# Altium PCB XKT3619_wireless_charging_driver_R.PcbDoc
Units mil, origin at the board's own origin, x right, y up, seen from the top; angles counter-clockwise.
Board outline 1181.1 x 591.1 mil, 2 copper layers (Top Layer, Bottom Layer); 16 components, 12 nets, 42 pads, 4 vias.
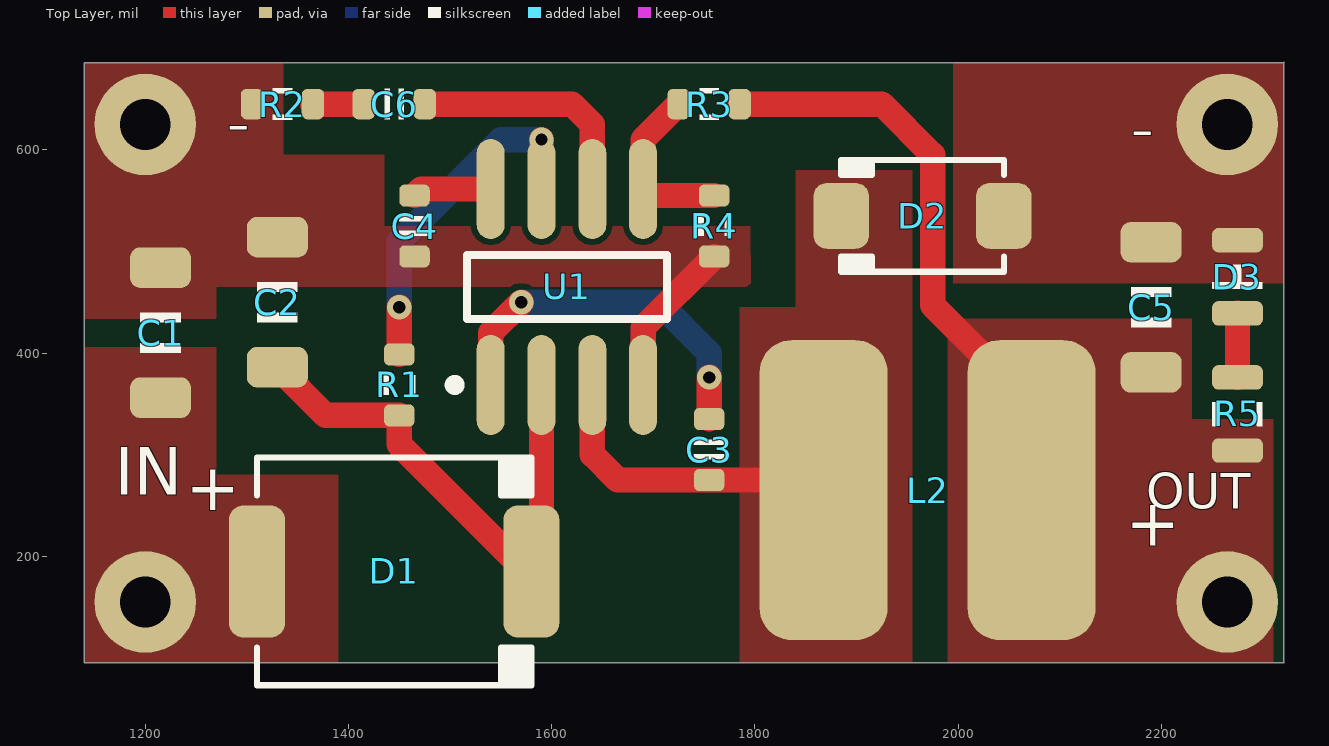
[diagram p0: Top Layer view]
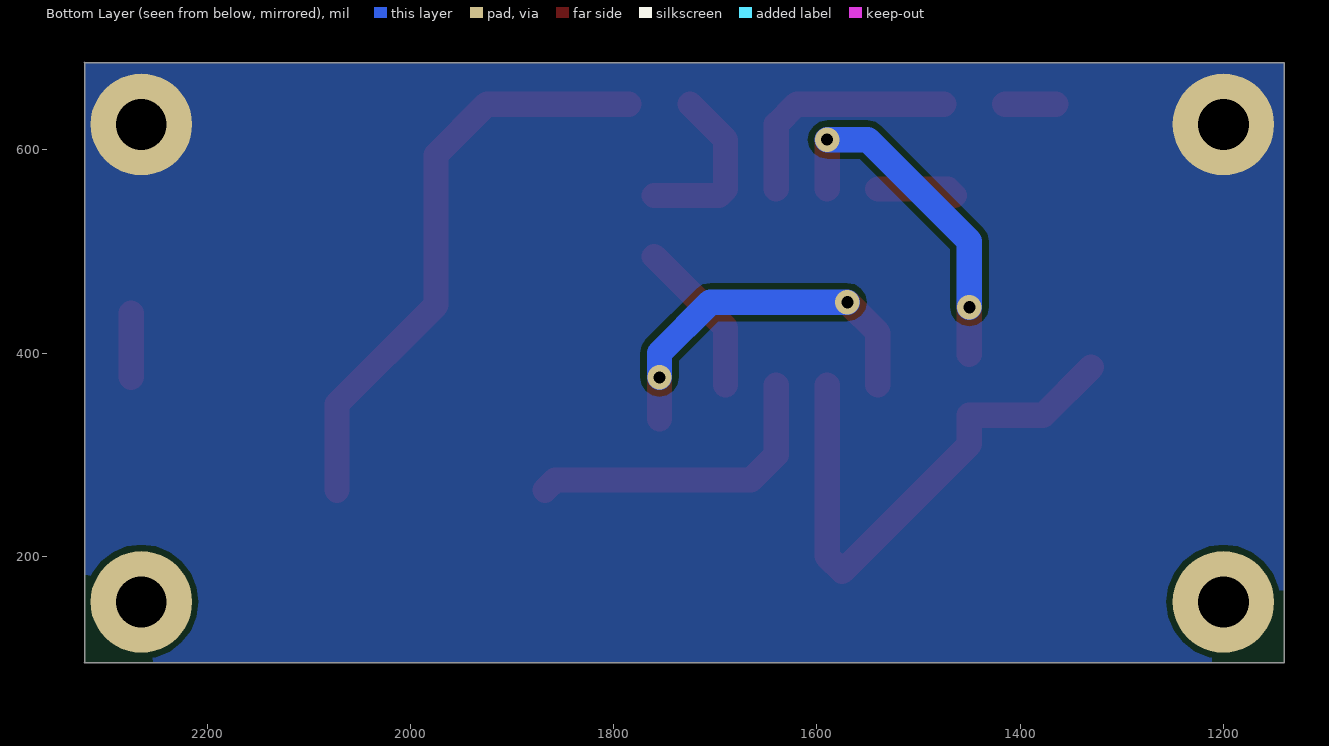
[diagram p1: Bottom Layer view, seen from below]
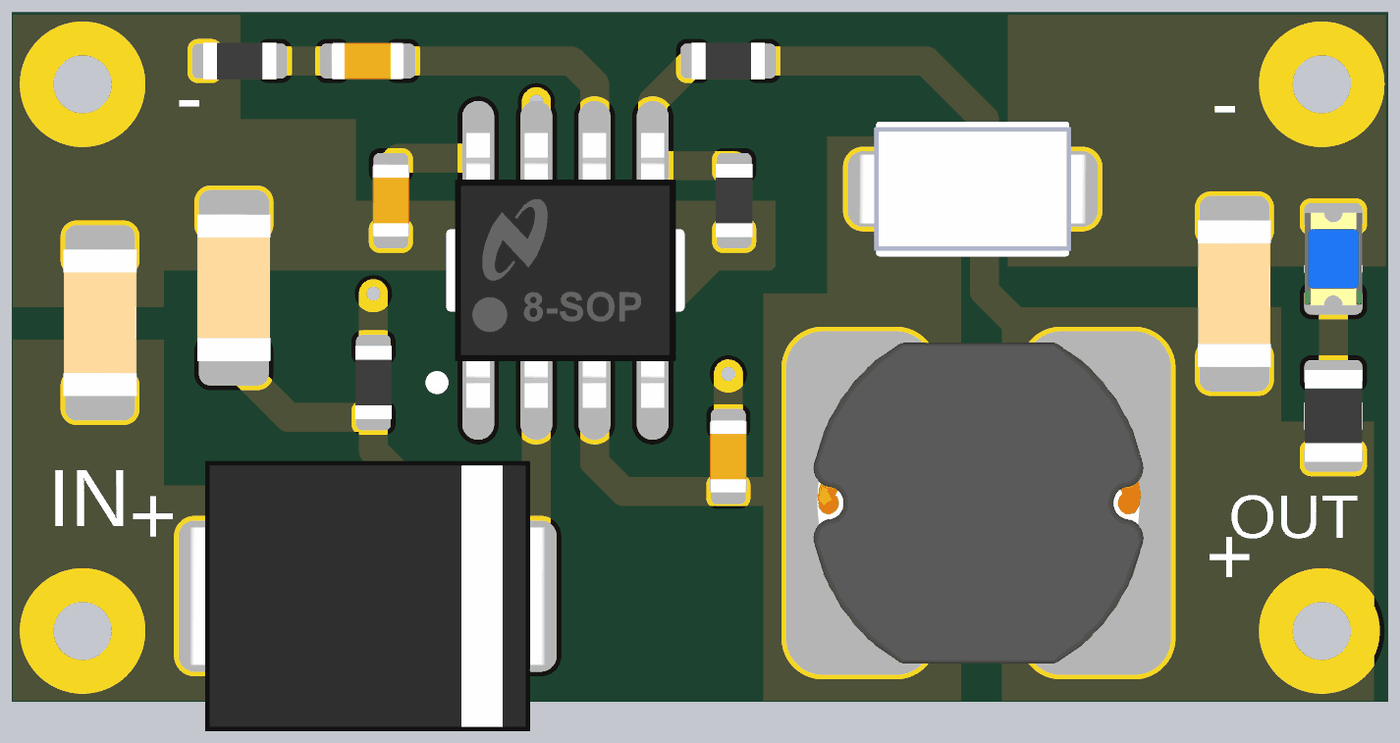
[diagram p2: 3D render of the assembled board from above, using the file's embedded part models]

## Layer stack, top to bottom
Top Solder: solder mask 0.4, Solder Resist, Dk 3.5
Top Layer: signal copper 1.4
Dielectric 1: dielectric 12.6, FR-4, Dk 4.8
Bottom Layer: signal copper 1.4
Bottom Solder: solder mask 0.4, Solder Resist, Dk 3.5

## Board outline
1140,95 2321.1,95 2320.55,95.55 2320.55,686.1 2321.1,685.55 1140,685.55

## Design rules (kind name [scope] priority, off if disabled: settings)
Clearance [All] p1: gap=6 ignorepadtopadclearanceinfootprint=FALSE
PolygonConnect [All] p1: connectstyle=Direct reliefconductorwidth=10 reliefentries=4 polygonreliefangle="90 Angle" airgapwidth=10
RoutingVias [All] p1: holewidth=12 width=24 viastyle="Through Hole" minholewidth=10 minwidth=22 maxholewidth=256 maxwidth=300
ShortCircuit [All] p1: allowed=TRUE
SolderMaskExpansion [All] p1: expansion=4
Width [All] p1: maxlimit=10000 minlimit=6 preferedwidth=10 minimp=50.000000 maximp=50.000000 favimp=50.000000
29 further rules are at their usual default settings.

## Components (designator, comment, footprint, x,y, rotation, side; value= is the part's Value field where it differs from the comment)
C1 "Cap" CAP_1206 1215,420 r270 top value=39NF
C2 "Cap" CAP_1206 1330,450 r270 top value=10uF
C3 "Cap" CAP_0603 1755,305 r90 top value=10nF
C4 "Cap" CAP_0603 1465,525 r270 top value=100nF
C5 "Cap" CAP_1206 2190,445 r270 top value=22F
C6 "Cap" CAP_0603 1445,645 r180 top value=3.3nF
D1 "SS510" DO-214AB 1445,185 r0 top
D2 "SS34" DO-214AC 1965,535 r180 top
D3 "Red" LED_0805 2275,475 r90 top
L2 "Ind" IND_CD75 1970,265 r0 top value=15uH
R1 "Res" RES_0603 1450,368.54 r90 top value=100K
R2 "Res" RES_0603 1335,645 r0 top value=6.8K
R3 "Res" RES_0603 1755,645 r0 top value=44.2K
R4 "Res" RES_0603 1760,525 r90 top value=10K
R5 "Res" RES_0805 2275,340 r270 top value=1K
U1 "XLT-3169" SOP8_M 1615,465 r90 top

## Footprints (in the part's own frame and the unit in brackets; to place one, negate y for a bottom-side part, rotate by r counter-clockwise, add the part's x,y. Pads: shape width x height; smd on the part's side, far side on the other; paste and mask are expansions set on the pad)
CAP_0603 [mil]
  rrect50% 22x30 smd: 1(-30,0) 2(30,0)
  silkscreen extent -10,-15 10,15, body extent -31,-16 31,16, height 31
CAP_1206 [mil]
  rrect50% 40x60 smd: 1(-64,0) 2(64,0)
  silkscreen extent -20,-20 20,20, body extent -65,-31 65,31, height 49
DO-214AB [mil] "SMC"
  rrect50% 55x130 smd: 1(-135,0) 2(135,0)
  silkscreen extent -135,-112 135,112, body extent -154,-116 154,116, height 95
DO-214AC [mil] "SMA"
  rrect50% 55x65 smd: 1(-80,0) 2(80,0)
  silkscreen extent -80,-55 80,55, body extent -98,-53 98,53, height 85
IND_CD75 [mm]
  rrect50% 3.2x7.5 smd: 1(-2.6,0) 2(2.6,0)
  body extent -3.6,-3.5 3.6,3.5, height 5
LED_0805 [mil]
  rrect50% 24x50 smd: 1(-36,0) 2(36,0)
  silkscreen extent -12,-24 12,24, body extent -40,-25 40,25, height 43
RES_0603 [mil]
  rrect50% 22x30 smd: 1(-30,0) 2(30,0)
  silkscreen extent -10,-16 10,16, body extent -31,-16 31,16, height 18
RES_0805 [mil]
  rrect50% 24x50 smd: 1(-36,0) 2(36,0)
  silkscreen extent -12,-25 12,25, body extent -39,-25 39,25, height 24
SOP8_M [mm] "SOIC, 8-Leads, Body 4.9x3.9"
  oval 2.5x0.7 smd: 1(-2.45,1.905) 2(-2.45,0.635) 3(-2.45,-0.635) 4(-2.45,-1.905) 5(2.45,-1.905) 6(2.45,-0.635) 7(2.45,0.635) 8(2.45,1.905)
  silkscreen extent -2.57,-2.5 0.8,2.93, body extent -3,-2.41 3,2.41, height 1.7

## Part data
D1 D2: library part SchottkyDiode, "Schottky Diode"
D3: library part LED, "LED"
L2: "Inductor", Specification="±5% 100mA"
U1: "XKT-3169 是芯科泰无线充电系列通用接收集成电路，体积小输出功率大，可配合各种无线充电方案应用，电路简单使用方便"

## Free pads (board coordinates)
  round 100 hole 50: C(1200,155) C(1200,625) C(2265,155) C(2265,625)

## Via types
v1: diameter 24, hole 12, Top Layer to Bottom Layer, 4 vias

## Nets (pads, with @x,y where several pads share a name; then routed paths per layer and width w, separated by ;. In a path a pad name is that pad's centre, name@x,y a point inside that pad or via, vN(x,y) a via of type N, cw(c..) or ccw(c..) an arc to the next point about the centre after c; other vN are vias at no path point)
GND: C1.1 C2.1 C4.2 C5.1 D2.1 D3.2 pad.C@1200,625 pad.C@2265,625 R2.1 R4.1 U1.4 | length 155.5
  Top Layer w25: U1.4 1690,425 R4.1
IN: C1.2 D1.1 pad.C@1200,155
NetC2_2: C2.2 D1.2 R1.1 U1.2 | length 534.7
  Top Layer w25: C2.2 1377.46,338.54 R1.1 1450,310 1575,185 1590,200 U1.2
NetC3_1: C3.1 D2.2 L2.1 U1.3 | length 310.7
  Top Layer w25: U1.3 1640,300 1665,275 C3.1 1857.64,275 L2.1
NetC3_2: C3.2 U1.1 | length 364.6
  Top Layer w25: U1.1 1540,420 v1(1570,450) ; C3.2 v1(1755,376)
  Bottom Layer w25: v1(1570,450) 1705,450 1755,400 v1(1755,376)
NetC4_1: C4.1 U1.8 | length 77.7
  Top Layer w25: C4.1 1471.46,561.46 U1.8
NetC6_1: C6.1 U1.6 | length 236.8
  Top Layer w25: C6.1 1620,645 1640,625 U1.6
NetC6_2: C6.2 R2.2 | length 50
  Top Layer w25: R2.2 C6.2
NetD3_1: D3.1 R5.1 | length 63
  Top Layer w25: R5.1 D3.1
NetR1_2: R1.2 U1.7 | length 341.4
  Top Layer w25: R1.2 v1(1450,445) ; U1.7 v1(1590,610)
  Bottom Layer w25: v1(1450,445) 1450,510 1550,610 v1(1590,610)
NetR3_1: R3.1 R4.2 U1.5 | length 170.7
  Top Layer w25: R3.1 1690,610 U1.5 1696.46,555 R4.2
OUT: C5.2 L2.2 pad.C@2265,155 R3.2 R5.2 | length 581
  Top Layer w25: R3.2 1925,645 1975,595 1975,447.01 2072.36,349.65 L2.2

## Polygon pours and split planes (outlines as drawn)
GND on Top Layer "GND" (solid, pour order 7): 2320,685 2320,468.54 1995,468.54 1995,685
GND on Top Layer "GND_L01_P005" (solid, pour order 5): 1140,685 1140,433.5 1268.88,433.5 1270,434.63 1270,465 1795.77,465 1795.66,525 1435,525 1435,595 1335.87,595 1335.87,685
IN on Top Layer "GND" (solid, pour order 3): 1140,405.42 1140,95 1390,95 1390,280 1270,280 1270,405.42
NetC3_1 on Top Layer "NETC3_1_L01_P001" (solid, pour order 1): 1955,95 1955,580 1840,580 1840,445 1785,445 1785,304 1785,95
OUT on Top Layer "OUT_L01_P000" (solid, pour order 0): 2310,335 2230,335 2230,433.5 1990,433.5 1990,95 2310,95
GND on Bottom Layer "GND" (solid, pour order 9): 1140,685 1140,95 2320,95 2320,685

## Silkscreen, mask and mechanical layers (free items; w line width, h text height)
Top Overlay:
  text "-" at 1280,590 h80
  text "-" at 2170,585 h80
  text "IN" at 1170,245 h80
  text "OUT" at 2185,235 h60
  text "+" at 1240,230 h80
  text "+" at 2165,195 h80
Mechanical 1:
  lines w10: 2320.55,95.55 2320.55,686.1 ; 2321.1,95 1140,95 1140,685.55 2321.1,685.55